# Altium PCB ILink.PcbDoc
Units mm, origin at the board's own origin, x right, y up, seen from the top; angles counter-clockwise.
Board outline 104 x 95.1 mm, 2 copper layers (Top Layer, Bottom Layer); 100 components, 66 nets, 309 pads, 31 vias.
Unrouted connection lines stored in the file: 2.
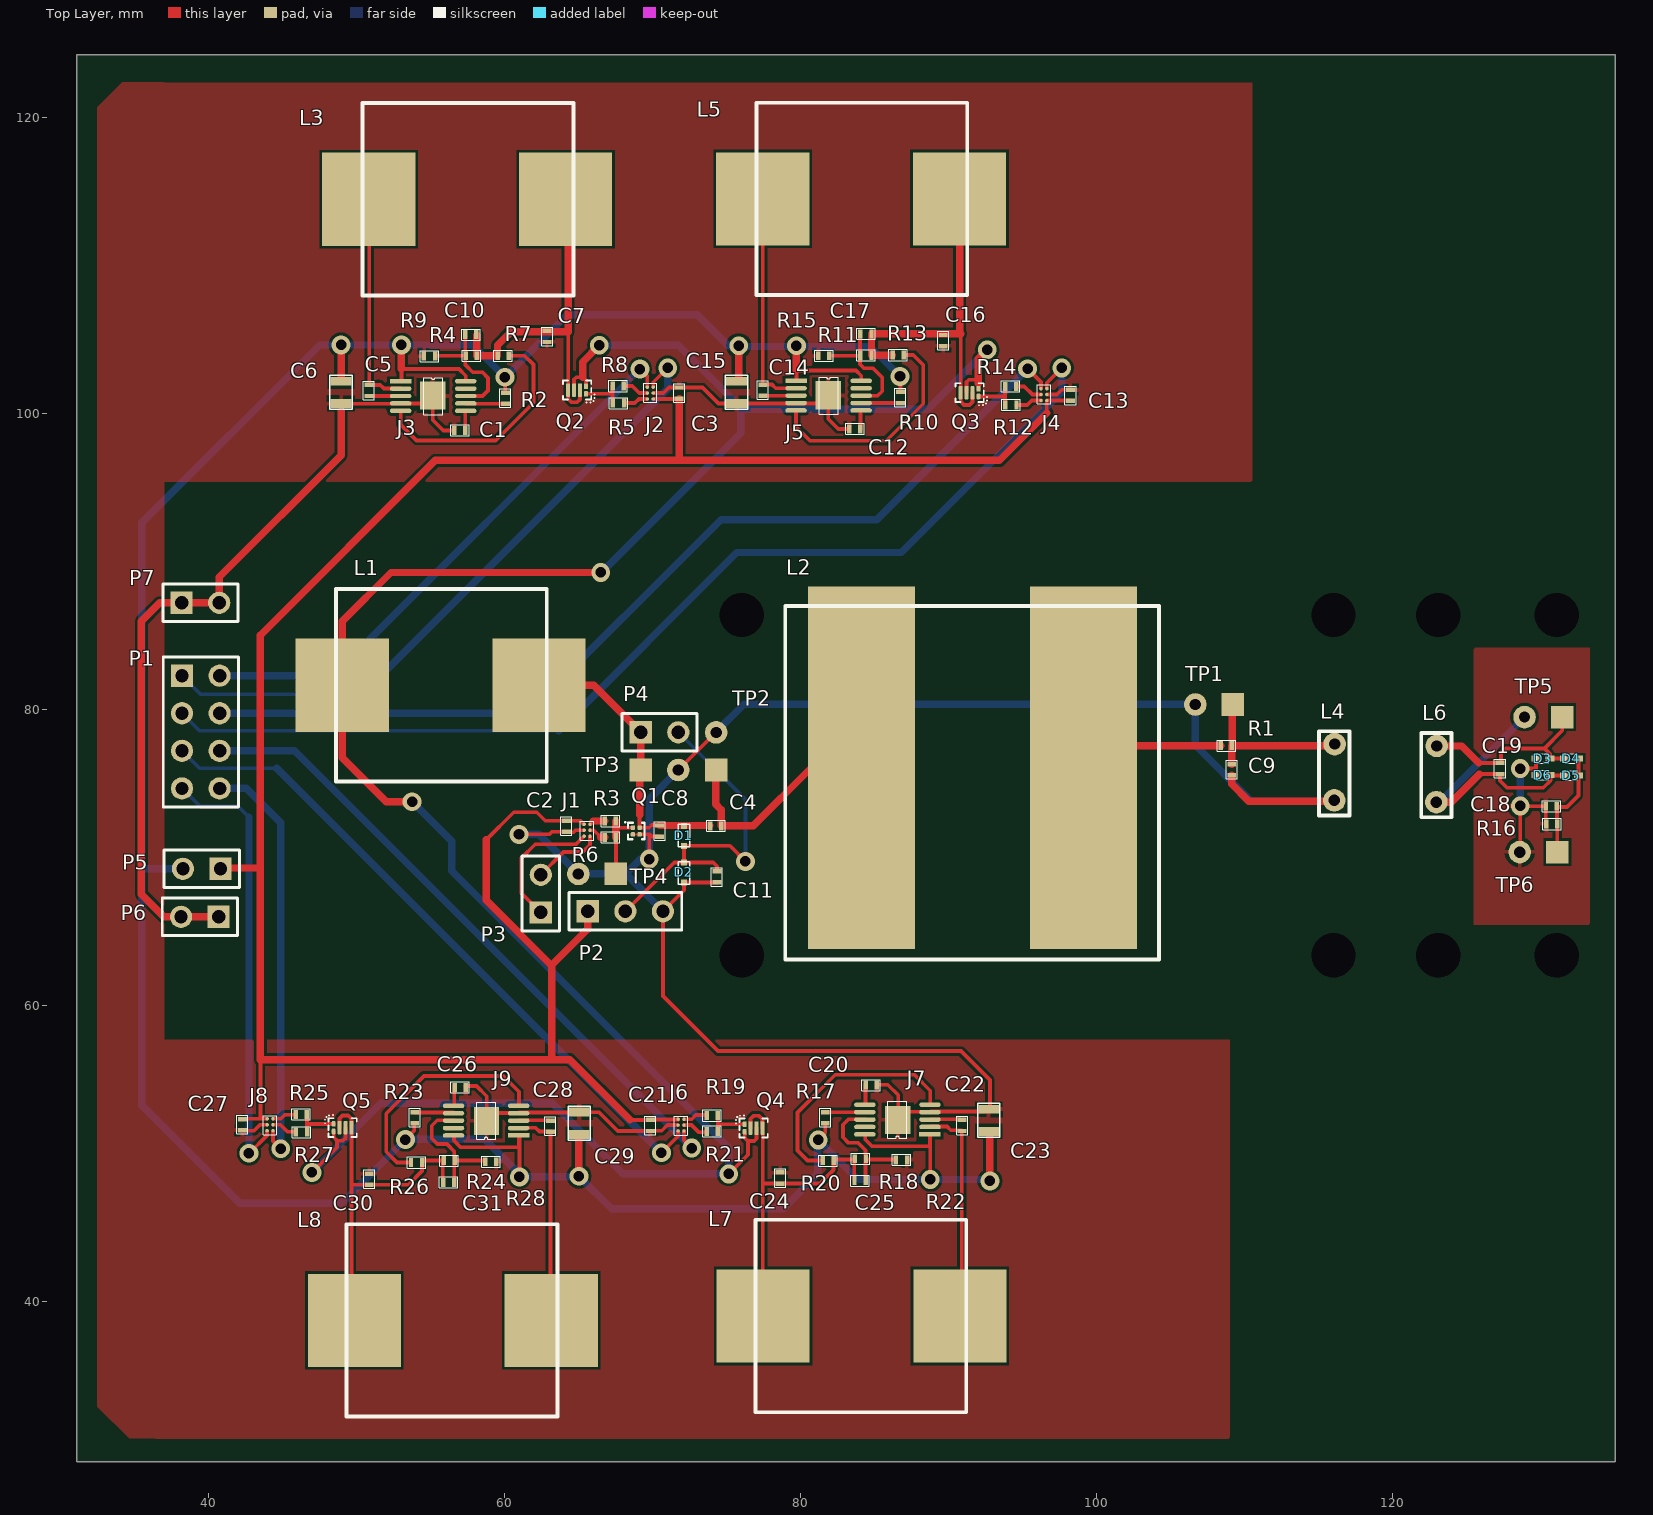
[diagram p0: Top Layer view]
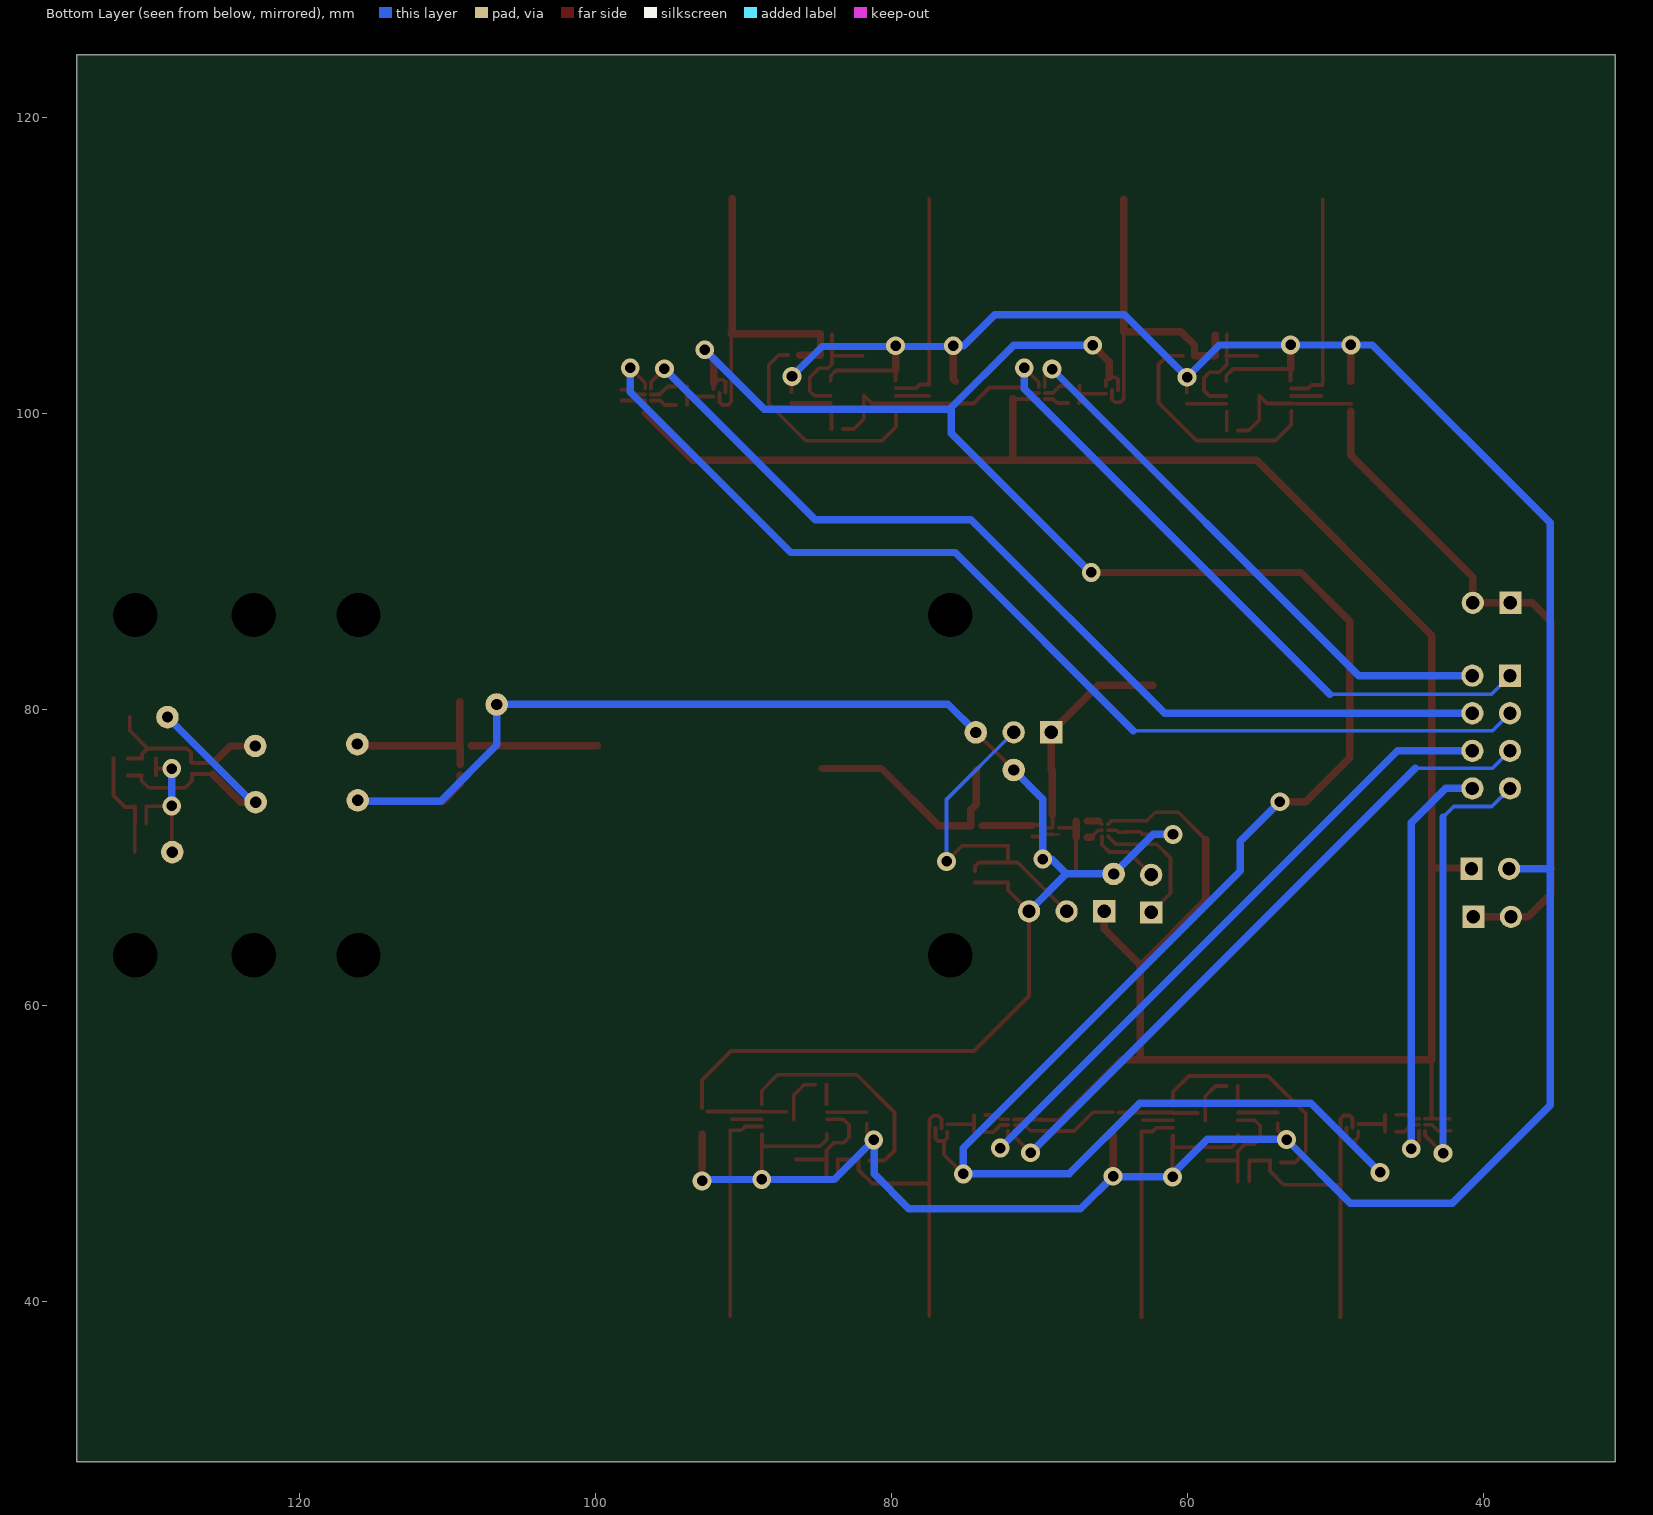
[diagram p1: Bottom Layer view, seen from below]

## Layer stack, top to bottom
Top Solder: solder mask 0.0102, Solder Resist, Dk 3.5
Top Layer: signal copper 0.0356
Dielectric 1: dielectric 0.32, FR-4, Dk 4.8
Bottom Layer: signal copper 0.0356
Bottom Solder: solder mask 0.0102, Solder Resist, Dk 3.5

## Board outline
31.075,29.15 135.075,29.15 135.075,124.25 31.075,124.25

## Design rules (kind name [scope] priority, off if disabled: settings)
Clearance [All] p1: gap=0.2 except(0.1: Arc-Arc SMDPad-Text Arc-Track Arc-SMDPad Arc-Via THPad-Via Via-Via Track-SMDPad Track-Track SMDPad-Via Track-Via Track-THPad Arc-THPad Via-Text SMDPad-SMDPad Track-Text Text-Text Arc-Text THPad-THPad THPad-Text SMDPad-THPad)
PolygonConnect [All] p1: connectstyle=Relief reliefconductorwidth=0.254 reliefentries=4 polygonreliefangle="90 Angle" airgapwidth=0.254
RoutingVias [All] p1: holewidth=0.711 width=1.27 viastyle="Through Hole" minholewidth=0.711 minwidth=1.27 maxholewidth=0.711 maxwidth=1.27
SolderMaskExpansion [All] p1: expansion=0.102
UnpouredPolygon [All] p1: allowunpoured=FALSE
Width [All] p1: maxlimit=1 minlimit=0.127 preferedwidth=0.254
29 further rules are at their usual default settings.

## Components (designator, comment, footprint, x,y, rotation, side; value= is the part's Value field where it differs from the comment)
C1 "Cap" 0402 56.975,98.85 r0 top
C2 "Cap" 0402 64.175,72.1 r270 top
C3 "Cap" 0402 71.8,101.375 r90 top
C4 "Cap" 0402 74.275,72.125 r180 top
C5 "Cap" 0402 50.825,101.55 r270 top
C6 "Cap" 0805 48.95,101.425 r90 top
C7 "Cap" 0402 62.875,105.2 r90 top
C8 "Cap" 0402 70.475,71.775 r90 top
C9 "Cap" 0402 109.15,75.925 r90 top
C10 "Cap" 0402 57.725,105.325 r180 top
C11 "Cap" 0402 74.35,68.675 r90 top
C12 "Cap" 0402 83.675,98.95 r0 top
C13 "Cap" 0402 98.25,101.225 r90 top
C14 "Cap" 0402 77.45,101.575 r270 top
C15 "Cap" 0805 75.675,101.425 r90 top
C16 "Cap" 0402 89.65,104.925 r90 top
C17 "Cap" 0402 84.425,105.375 r180 top
C18 "Cap" 0402 130.75,73.45 r0 top
C19 "Cap" 0402 127.275,76 r90 top
C20 "Cap" 0402 84.775,54.6 r180 top
C21 "Cap" 0402 69.85,51.875 r270 top
C22 "Cap" 0402 90.925,51.875 r90 top
C23 "Cap" 0805 92.725,52.225 r270 top
C24 "Cap" 0402 78.625,48.325 r270 top
C25 "Cap" 0402 84.025,48.15 r0 top
C26 "Cap" 0402 57,54.45 r180 top
C27 "Cap" 0402 42.275,51.925 r270 top
C28 "Cap" 0402 63.1,51.825 r90 top
C29 "Cap" 0805 65.05,52.025 r270 top
C30 "Cap" 0402 50.85,48.25 r270 top
C31 "Cap" 0402 56.225,48.025 r0 top
D1 "Diode BBY40" Varactor 72.125,72.125 r270 top
D2 "Diode BBY40" Varactor 72.125,68.3 r90 top
D3 "D Schottky" Diode2 129.775,76.675 r0 top
D4 "D Schottky" Diode2 131.7,76.675 r0 top
D5 "D Schottky" Diode2 131.7,75.525 r0 top
D6 "D Schottky" Diode2 129.775,75.55 r0 top
J1 "LMG1020" WCSP6 65.375,72.225 r0 top
J2 "LMG1020" WCSP6 70.05,100.975 r180 top
J3 "LTC3103" MSOP10(DGS) 52.975,102.175 r0 top
J4 "LMG1020" WCSP6 96.65,100.875 r180 top
J5 "LTC3103" MSOP10(DGS) 79.7,102.2 r0 top
J6 "LMG1020" WCSP6 71.725,52.3 r0 top
J7 "LTC3103" MSOP10(DGS) 88.75,51.275 r180 top
J8 "LMG1020" WCSP6 43.95,52.325 r0 top
J9 "LTC3103" MSOP10(DGS) 60.95,51.2 r180 top
L1 "Inductor" Inductor_1 49.025,81.625 r0 top
L2 "Inductor" Inductor_3 84.125,76.05 r0 top
L3 "Inductor" Inductor_1 50.825,114.475 r0 top
L4 "Inductor" Coils1 116.075,77.65 r270 top
L5 "Inductor" Inductor_1 77.45,114.5 r0 top
L6 "Inductor" Coils1 122.975,77.525 r270 top
L7 "Inductor" Inductor_1 90.775,39 r180 top
L8 "Inductor" Inductor_1 63.15,38.7 r180 top
P1 "Header 4X2" HDR2X4 38.2,82.275 r270 top
P2 "Header 3" HDR1X3 65.625,66.35 r0 top
P3 "Header 2" HDR1X2 62.45,66.275 r90 top
P4 "Header 2" HDR1X2 69.2,78.45 r0 top
P5 "Header 2" HDR1X2 40.8,69.225 r180 top
P6 "Header 2" HDR1X2 40.675,65.975 r180 top
P7 "Header 2" HDR1X2 38.175,87.2 r0 top
Q1 "EPC2037" EPC2X_2by2 68.9,71.775 r0 top
Q2 "EPC2014C" EPC2x40S 64.9,101.575 r180 top
Q3 "EPC2014C" EPC2x40S 91.425,101.4 r180 top
Q4 "EPC2014C" EPC2x40S 76.825,51.7 r0 top
Q5 "EPC2014C" EPC2x40S 49.05,51.725 r0 top
R1 "Res1" 0402 108.775,77.55 r0 top
R2 "Res1" 0402 60.05,101.025 r90 top
R3 "Res1" 0402 67.15,72.45 r0 top
R4 "Res1" 0402 57.75,103.9 r180 top
R5 "Res1" 0402 67.7,100.7 r180 top
R6 "Res1" 0402 67.15,71.35 r0 top
R7 "Res1" 0402 59.9,103.9 r180 top
R8 "Res1" 0402 67.675,101.85 r180 top
R9 "Res1" 0402 54.925,103.875 r0 top
R10 "Res1" 0402 86.75,101.075 r90 top
R11 "Res1" 0402 84.425,103.925 r180 top
R12 "Res1" 0402 94.225,100.575 r180 top
R13 "Res1" 0402 86.6,103.95 r180 top
R14 "Res1" 0402 94.2,101.825 r180 top
R15 "Res1" 0402 81.575,103.9 r0 top
R16 "Res1" 0402 130.775,72.25 r0 top
R17 "Res1" 0402 81.675,52.4 r270 top
R18 "Res1" 0402 84.05,49.625 r0 top
R19 "Res1" 0402 74.025,52.55 r0 top
R20 "Res1" 0402 81.875,49.5 r0 top
R21 "Res1" 0402 74.025,51.475 r0 top
R22 "Res1" 0402 86.825,49.55 r180 top
R23 "Res1" 0402 53.925,52.4 r270 top
R24 "Res1" 0402 56.25,49.5 r0 top
R25 "Res1" 0402 46.25,52.625 r0 top
R26 "Res1" 0402 54.05,49.375 r0 top
R27 "Res1" 0402 46.275,51.425 r0 top
R28 "Res1" 0402 59.075,49.425 r180 top
TP1 "Test_Point" Test_Point 109.225,80.325 r180 top
TP2 "Test_Point" Test_Point 74.3,75.9 r90 top
TP3 "Test_Point" Test_Point 69.2,75.9 r0 top
TP4 "Test_Point" Test_Point 67.525,68.875 r180 top
TP5 "Test_Point" Test_Point 131.475,79.475 r180 top
TP6 "Test_Point" Test_Point 131.15,70.35 r180 top

## Footprints (in the part's own frame and the unit in brackets; to place one, negate y for a bottom-side part, rotate by r counter-clockwise, add the part's x,y. Pads: shape width x height; smd on the part's side, far side on the other; paste and mask are expansions set on the pad)
0402 [mm]
  rect 0.3x0.6 smd: 1(-0.375,0) 2(0.375,0)
  silkscreen extent -0.63,-0.38 0.63,0.38
0805 [mm]
  rect 0.6x1.4 smd: 1(-0.75,0) 2(0.75,0)
  silkscreen extent -1.15,-0.75 1.15,0.75
Coils1 [mil] "Parisa coil footprint"
  round 60 hole 30: 1(0,0.98) 2(149.61,0)
  silkscreen extent -34,-40 190,40
Diode2 [mm] "PMEG2010AEB"
  rect 0.6x0.4 smd mask+0.05: 1(-0.075,0) 2(0.875,0)
  silkscreen extent 0,-0.32 0.8,0.33
EPC2x40S [mm]
  rrect50% 0.27x0.38 smd paste-0.048 mask-0.275: 1(-0.6,0.254) 2(-0.6,-0.254)
  rrect50% 0.27x0.909 smd paste-0.048 mask-0.275: 3(-0.2,0) 4(0.2,0) 5(0.6,0)
  oval 0.18x0.31 on Top Solder: ""(-0.6,-0.254) ""(-0.6,0.254)
  oval 0.18x0.817 on Top Solder: ""(-0.2,0) ""(0.2,0) ""(0.6,0)
  silkscreen extent -1.18,-0.64 0.96,0.85, body extent -0.87,-0.55 0.87,0.55, height 0.85
EPC2X_2by2 [mm]
  rrect50% 0.3x0.3 smd paste-0.025 mask-0.148: 1(-0.225,0.225) 2(-0.225,-0.225) 3(0.225,0.225) 4(0.225,-0.225)
  round 0.2 on Top Solder paste+0 mask+0: 1(-0.225,0.225) 2(-0.225,-0.225) 3(0.225,0.225) 4(0.225,-0.225)
  silkscreen extent -0.74,-0.56 0.56,0.59, body extent -0.45,-0.45 0.45,0.45, height 0.85
HDR1X2 [mm] "Connector; Header; 2 Position"
  rect 1.5x1.5 hole 0.9: 1(0,0)
  round 1.5 hole 0.9: 2(2.54,0)
  silkscreen extent -1.27,-1.27 3.81,1.27
HDR1X3 [mm] "Connector; Header; 3 Position"
  rect 1.5x1.5 hole 0.9: 1(0,0)
  round 1.5 hole 0.9: 2(2.54,0) 3(5.08,0)
  silkscreen extent -1.27,-1.27 6.35,1.27
HDR2X4 [mm] "Connector; Header; 4x2 Position"
  rect 1.5x1.5 hole 0.9: 1(0,0)
  round 1.5 hole 0.9: 2(0,2.54) 3(2.54,0) 4(2.54,2.54) 5(5.08,0) 6(5.08,2.54) 7(7.62,0) 8(7.62,2.54)
  silkscreen extent -1.27,-1.27 8.89,3.81
Inductor_1 [mm] "WE"
  rect 6.3x6.3 smd mask+0.2: 1(0,0) 2(13.3,0)
  silkscreen extent -0.43,-6.5 13.82,6.5
Inductor_3 [mm] "EPCOS (TDK): B82559A2122A025?"
  rect 7.25x24.5 smd: 1(0,0) 2(15,0)
  silkscreen extent -5.15,-12.95 20.1,10.92
MSOP10(DGS) [mm]
  rect 1.45x0.3 smd mask+0.05: 1(0,0)
  oval 1.45x0.3 smd mask+0.05: 2(0,-0.5) 3(0,-1) 4(0,-1.5) 5(0,-2) 6(4.4,-2) 7(4.4,-1.5) 8(4.4,-1) 9(4.4,-0.5) 10(4.4,0)
  rect 1.7x1.9 smd: 11(2.175,-0.975)
  silkscreen extent 1.56,-2.25 2.84,0.25
Test_Point [mil]
  rect 60x60 smd paste+0 mask+0: 1(0,0)
  round 60 hole 30: 2(100,0)
Varactor [mm] "Infinion Varactor BBY66Series"
  rect 0.4x0.4 smd: 1(0,0) 2(1.35,0)
  silkscreen extent -0.13,-0.4 1.4,0.4
WCSP6 [mm]
  round 0.23 smd mask+0.05: A1(0,0) A2(0.4,0) B1(0,-0.4) B2(0.4,-0.4) C1(0,-0.8) C2(0.4,-0.8)
  silkscreen extent -0.25,-1.07 0.65,0.21

## Part data
C1 C2 C3 C4 C5 C6 C7 C8 C9 C10 C11 C12 C13 C14 C15 C16 C17 C18 C19 C20 C21 C22 C23 C24 C25 C26 C27 C28 C29 C30 C31: "Capacitor"
D1 D2: "SOT23 Silicon Planar Variable Capacitance Diode"
D3 D4 D5 D6: "Schottky Diode"
J1 J2 J4 J6 J8: "Low Side GaN Driver"
J3 J5 J7 J9: "LTC3103: Step-Down DC/DC  Converter"
P1: "Header, 4-Pin, Dual row"
P2: "Header, 3-Pin"
P3 P4 P5 P6 P7: "Header, 2-Pin"
Q1: "100V 550mE"
Q2 Q3 Q4 Q5: "40V 10A 16mE"
R1 R2 R3 R4 R5 R6 R7 R8 R9 R10 R11 R12 R13 R14 R15 R16 R17 R18 R19 R20 R21 R22 R23 R24 R25 R26 R27 R28: "Resistor"

## Free pads (board coordinates)
  round 0 hole 3: H1(76.025,86.375) H2(116.025,86.375) H3(76.025,63.375) H4(116.025,63.375) H5(123.1,86.375) H6(131.1,86.375) H7(123.1,63.375) H8(131.1,63.375)

## Via types
v1: diameter 1.27, hole 0.711, Top Layer to Bottom Layer, 31 vias

## Nets (pads, with @x,y where several pads share a name; then routed paths per layer and width w, separated by ;. In a path a pad name is that pad's centre, name@x,y a point inside that pad or via, vN(x,y) a via of type N, cw(c..) or ccw(c..) an arc to the next point about the centre after c; other vN are vias at no path point)
5V0: C2.1 C3.1 C13.1 C21.1 C27.1 J1.A1 J2.A1 J4.A1 J6.A1 J8.A1 P2.1 P5.1 | length 164.1
  Top Layer w0.127: C13.1@98.225,100.875 C13.1
  Top Layer w0.254: P5.1@40.75,68.9 P5.1@40.75,69.275 ; C27.1 42.275,52.325 J8.A1 ; 43.5,52.4 43.5,56.325 ; 58.75,71.175 60.625,73.05 62.175,73.05 62.75,72.475 C2.1 65.125,72.475 J1.A1 ; 63.175,62.675 63.175,62.7 ; 68.475,52.25 C21.1 ; C21.1@69.875,52.275 J6.A1@71.725,52.275 ; J2.A1 C3.1@71.775,100.975 ; 96.65,100.025 J4.A1 C13.1@98.225,100.875
  Top Layer w0.5: P5.1@40.75,69.275 43.5,69.275 ; 58.75,71.175 58.75,67.1 63.175,62.675 63.175,56.4 ; 63.175,62.7 65.625,65.15 P2.1 ; 68.475,52.25 64.4,56.325 43.5,56.325 43.5,69.275 ; C3.1 71.8,96.825 ; 96.65,100.025 93.45,96.825 71.8,96.825 ; 43.5,69.275 43.5,85 55.325,96.825 71.8,96.825
EN1: J3.7 R2.1 | length 2.6
  Top Layer w0.254: J3.7@57.4,100.65 R2.1
EN2: J5.7 R10.1 | length 2.6
  Top Layer w0.254: J5.7 R10.1
EN3: J7.7 R17.1 | length 2.6
  Top Layer w0.254: R17.1@81.725,52.775 J7.7@84.375,52.775
EN4: J9.7 R23.1 | length 2.6
  Top Layer w0.254: R23.1@53.9,52.75 J9.7@56.55,52.75
GND: C1.1 C2.2 C3.2 C6.1 C7.1 C8.1 C9.1 C11.1 C12.1 C13.2 C15.1 C16.1 C20.1 C21.2 C23.1 C24.1 C26.1 C27.2 C29.1 C30.1 D2.1 J1.B1 J2.B1 J3.4 J3.11 J4.B1 J5.4 J5.11 J6.B1 J7.4 J7.11 J8.B1 J9.4 J9.11 L4.2 P2.3 P6.1 P6.2 P7.1 P7.2 Q1.2@68.675,71.55 Q1.4@69.125,71.55 R9.1 R15.1 R22.1 R28.1 TP1.2 TP2.2 TP3.2 TP4.2 | length 224.6
  Top Layer w0.127: Q1.2@68.675,71.55 Q1.4@69.125,71.55
  Top Layer w0.25: C27.2@42.225,51.525 43.075,51.525
  Top Layer w0.254: 43.075,51.525 43.475,51.925 J8.B1 ; C6.1@48.95,100.65 J3.4@52.95,100.65 ; J3.4 54.625,100.675 J3.11 55.15,99.55 55.85,98.85 C1.1 ; C26.1@57.35,54.55 58.1,54.55 58.8,53.85 J9.11@58.8,52.2 ; J9.11@59.325,52.725 J9.4@60.975,52.725 ; v1(60.975,71.55) 60.975,71.75 61.175,71.55 63.025,71.55 63.2,71.725 C2.2 64.2,71.7 64.675,71.7 64.8,71.825 J1.B1 ; J9.4@61,52.75 C29.1@64.65,52.75 ; C29.1 66.375,52.775 67.65,51.5 C21.2 ; Q1.4@69.125,71.55 69.8,71.55 69.95,71.4 C8.1 ; v1(69.775,69.875) 69.775,71.525 ; C21.2@69.925,51.525 70.625,51.525 71,51.9 J6.B1@71.675,51.9 ; J2.B1 70.725,101.375 71.1,101.75 C3.2 73.375,101.75 74.45,100.675 C15.1 81.325,100.675 J5.11 81.875,99.625 82.55,98.95 C12.1 ; TP3.2 TP2.2@74.275,78.435 ; C11.1 D2.1 72.125,67.77 P2.3 70.705,60.62 74.425,56.9 90.85,56.9 92.8,54.95 C23.1@92.8,53.05 ; C20.1@85.15,54.625 85.9,54.625 86.6,53.925 J7.11@86.6,52.275 ; J7.11@87.125,52.8 J7.4@88.775,52.8 ; J7.4@88.8,52.825 C23.1@92.45,52.825 ; J4.B1 97.325,101.275 97.65,101.6 C13.2
  Top Layer w0.5: P6.1 P6.2 36.975,65.975 35.45,67.5 35.45,85.95 36.7,87.2 P7.1 P7.2 40.715,88.94 48.95,97.175 48.95,100.148 ; C9.1 109.15,74.95 110.3,73.8 L4.2@115.975,73.8
  Bottom Layer w0.5: v1(60.975,71.55) 62.31,71.55 TP4.2 68.18,68.875 ; P2.3 68.18,68.875 ; TP3.2 69.775,73.935 v1(69.775,69.875) 69.18,69.875 68.18,68.875 ; TP2.2@74.275,78.44 76.185,80.35 TP1.2@106.685,80.35 ; TP1.2 106.685,77.59 110.475,73.8 L4.2@115.975,73.8
GND2: C18.1 D3.1 D6.1 R16.1 TP6.2 | length 10.6
  Top Layer w0.254: TP6.2@128.65,70.39 v1@128.65,73.45 ; v1(128.65,73.475) v1@128.65,73.45 ; v1(128.65,76) 129.65,76 ; D6.1 D3.1 ; R16.1@130.375,72.275 C18.1 v1@128.65,73.45
  Bottom Layer w0.5: v1(128.65,73.475) v1(128.65,76)
NetC1_2: C1.2 J3.6 | length 1.3
  Top Layer w0.254: C1.2 J3.6@57.35,100.15
NetC5_1: C5.1 J3.2 L3.1 | length 14.8
  Top Layer w0.254: L3.1@50.852,114.475 50.852,101.925 51.6,101.925 51.85,101.675 J3.2
NetC5_2: C5.2 J3.3 | length 2
  Top Layer w0.254: C5.2@50.95,101.175 J3.3
NetC10_2: C10.2 J3.8 R4.2 R9.2 | length 8.5
  Top Layer w0.254: R9.2@55.3,103.9 R4.2@57.35,103.9 ; C10.2 R4.2@57.35,103.9 ; J3.8 58.5,101.175 58.875,101.55 58.875,102.4 58.5,102.775 57.85,102.775 57.35,103.275 R4.2@57.35,103.9 ; R4.2 R4.2@57.4,103.9
NetC12_2: C12.2 J5.6 | length 1.2
  Top Layer w0.254: C12.2 J5.6@84.05,100.15
NetC14_1: C14.1 J5.2 L5.1 | length 14.9
  Top Layer w0.254: L5.1 C14.1 78.075,101.95 78.325,101.7 J5.2
NetC14_2: C14.2 J5.3 | length 2.3
  Top Layer w0.254: C14.2 J5.3
NetC17_2: C17.2 J5.8 R11.2 R15.2 | length 8.4
  Top Layer w0.254: R15.2 R11.2@84.025,103.9 ; C17.2@84.025,105.35 R11.2@84.025,103.9 ; J5.8 85.225,101.2 85.525,101.5 85.525,102.425 84.9,103.05 84.3,103.05 84.025,103.325 R11.2@84.025,103.9
NetC20_2: C20.2 J7.6 | length 1.3
  Top Layer w0.254: J7.6@84.4,53.325 C20.2@84.4,54.625
NetC22_1: C22.1 J7.2 L7.1 | length 14.8
  Top Layer w0.254: J7.2@88.775,51.8 89.9,51.8 90.15,51.55 90.898,51.55 L7.1@90.898,39
NetC22_2: C22.2 J7.3 | length 2
  Top Layer w0.254: J7.3@88.775,52.3 C22.2@90.8,52.3
NetC25_2: C25.2 J7.8 R18.2 R22.2 | length 8.6
  Top Layer w0.127: R18.2@84.4,49.6 R18.2
  Top Layer w0.254: J7.8@84.375,52.3 83.25,52.3 82.875,51.925 82.875,51.075 83.25,50.7 83.9,50.7 84.4,50.2 R18.2@84.4,49.6 ; C25.2 R18.2@84.4,49.6 ; R22.2@86.45,49.575 84.4,49.575 R18.2@84.4,49.6
NetC26_2: C26.2 J9.6 | length 1.3
  Top Layer w0.254: J9.6@56.6,53.25 C26.2@56.6,54.55
NetC28_1: C28.1 J9.2 L8.1 | length 14.8
  Top Layer w0.254: J9.2@60.975,51.725 62.1,51.725 62.35,51.475 63.098,51.475 L8.1@63.098,38.925
NetC28_2: C28.2 J9.3 | length 2
  Top Layer w0.254: J9.3@60.975,52.225 C28.2@63,52.225
NetC31_2: C31.2 J9.8 R24.2 R28.2 | length 8.5
  Top Layer w0.254: J9.8@56.575,52.225 55.45,52.225 55.075,51.85 55.075,51 55.45,50.625 56.1,50.625 56.6,50.125 R24.2@56.6,49.5 ; C31.2@56.6,48.075 R24.2@56.6,49.5 ; R28.2@58.65,49.5 R24.2@56.6,49.5
NetJ1_A2: J1.A2 R3.1 | length 1.1
  Top Layer w0.254: J1.A2 66,72.45
  Top Layer w0.5: 66,72.45 R3.1
NetJ1_B2: J1.B2 R6.1 | length 1.2
  Top Layer w0.254: J1.B2 66.025,71.825 66.5,71.35
  Top Layer w0.5: 66.5,71.35 R6.1
NetJ2_A2: J2.A2 R5.1 | length 1.7
  Top Layer w0.254: R5.1 68.8,100.7 69.075,100.975 J2.A2
NetJ2_B2: J2.B2 R8.1 | length 1.8
  Top Layer w0.254: R8.1 68.625,101.85 69.1,101.375 J2.B2
NetJ3_5: J3.5 R7.1 | length 15.9
  Top Layer w0.254: J3.5 52.975,99.25 54.05,98.175 59.4,98.175 61.95,100.725 61.95,103.3 61.35,103.9 R7.1
NetJ4_A2: J4.A2 R12.1 | length 1.8
  Top Layer w0.254: R12.1 95.325,100.575 95.625,100.875 J4.A2
NetJ4_B2: J4.B2 R14.1 | length 1.9
  Top Layer w0.254: R14.1 95.125,101.825 95.675,101.275 J4.B2
NetJ5_5: J5.5 R13.1 | length 15.4
  Top Layer w0.254: J5.5 79.7,99.1 80.65,98.15 85.8,98.15 88.3,100.65 88.3,103.275 87.625,103.95 R13.1
NetJ6_A2: J6.A2 R19.1 | length 1.6
  Top Layer w0.254: J6.A2 72.65,52.3 72.925,52.575 R19.1@73.65,52.575
NetJ6_B2: J6.B2 R21.1 | length 1.7
  Top Layer w0.254: J6.B2 72.625,51.9 73.1,51.425 R21.1@73.675,51.425
NetJ7_5: J7.5 R20.1 | length 16
  Top Layer w0.254: R20.1 80.475,49.5 79.8,50.175 79.8,52.75 82.35,55.3 87.7,55.3 88.775,54.225 J7.5@88.775,53.3
NetJ8_A2: J8.A2 R25.1 | length 1.6
  Top Layer w0.254: J8.A2 44.875,52.325 45.15,52.6 R25.1@45.875,52.6
NetJ8_B2: J8.B2 R27.1 | length 1.7
  Top Layer w0.254: J8.B2 44.85,51.925 45.325,51.45 R27.1@45.9,51.45
NetJ9_5: J9.5 R26.1 | length 16
  Top Layer w0.254: R26.1 52.725,49.375 52,50.1 52,52.675 54.55,55.225 59.9,55.225 60.975,54.15 J9.5@60.975,53.225
NetL2_2: L2.2 R1.1 | length 8.5
  Top Layer w0.5: L2.2@99.875,77.55 R1.1
NetQ2_1: Q2.1 R5.2 R8.2 | length 3
  Top Layer w0.254: Q2.1 67.296,101.321 ; R8.2 67.3,100.725 R5.2
NetQ3_1: Q3.1 R12.2 R14.2 | length 3
  Top Layer w0.254: Q3.1 93.796,101.146 ; R12.2@93.825,100.6 R14.2
NetQ4_1: Q4.1 R19.2 R21.2 | length 2.9
  Top Layer w0.254: R21.2@74.425,51.425 R19.2@74.425,52.55 ; 74.429,51.954 Q4.1
NetQ5_1: Q5.1 R25.2 R27.2 | length 2.9
  Top Layer w0.254: R27.2@46.65,51.45 R25.2@46.65,52.575 ; 46.654,51.979 Q5.1
PS1C+: J2.C1 P1.1 | length 45
  Top Layer w0.254: J2.C1 70.05,102.1 v1(71.025,103.075)
  Bottom Layer w0.254: P1.1 39.45,81.025 50.375,81.025
  Bottom Layer w0.5: 50.375,81.025 71.025,101.675 v1(71.025,103.075)
PS1C-: J2.C2 P1.2 | length 38.8
  Top Layer w0.127: v1(69.15,103) 69.15,102.65 v1@69.325,102.825
  Top Layer w0.254: v1@69.325,102.825 69.65,102.5 J2.C2
  Bottom Layer w0.5: P1.2 48.425,82.275 v1(69.15,103)
PS2C+: J4.C1 P1.3 | length 72.9
  Top Layer w0.254: J4.C1 96.65,102.075 v1(97.65,103.075)
  Bottom Layer w0.254: P1.3 39.385,78.55 63.65,78.55
  Bottom Layer w0.5: 63.65,78.55 75.7,90.6 86.8,90.6 97.65,101.45 v1(97.65,103.075)
PS2C-: J4.C2 P1.4 | length 66
  Top Layer w0.254: v1(95.35,103.025) 96.25,102.125 J4.C2
  Bottom Layer w0.5: P1.4 61.535,79.735 74.625,92.825 85.15,92.825 v1(95.35,103.025)
PS3C+: J6.C1 P1.5 | length 45.6
  Top Layer w0.254: v1(70.6,50.025) 71.725,51.15 J6.C1
  Bottom Layer w0.254: P1.5 39.37,76.025 44.6,76.025
  Bottom Layer w0.5: 44.6,76.025 v1(70.6,50.025)
PS3C-: J6.C2 P1.6 | length 44.4
  Top Layer w0.25: 72.125,50.875 J6.C2
  Top Layer w0.254: 72.125,50.875 v1(72.65,50.35)
  Bottom Layer w0.5: P1.6 45.805,77.195 v1(72.65,50.35)
PS4C+: J8.C1 P1.7 | length 30.1
  Top Layer w0.127: v1(42.725,50) v1@42.75,50
  Top Layer w0.254: v1@42.75,50 43.95,51.2 J8.C1
  Bottom Layer w0.254: P1.7 39.43,73.425 42,73.425 42.725,72.7
  Bottom Layer w0.5: v1(42.725,50) 42.725,72.7
PS4C-: J8.C2 P1.8 | length 28.6
  Top Layer w0.254: J8.C2 44.35,50.825 v1(44.875,50.3)
  Bottom Layer w0.5: P1.8 42.545,74.655 44.875,72.325 v1(44.875,50.3)
SC+: J1.C1 P3.1 | length 9
  Top Layer w0.254: P3.1 61.15,67.575 61.15,69.95 62.075,70.875 64.825,70.875 J1.C1
SC-: J1.C2 P3.2 | length 4.7
  Top Layer w0.254: P3.2 63.985,70.35 65.275,70.35 65.775,70.85 J1.C2
V1: C4.1 L2.1 TP2.1 | length 15.6
  Top Layer w0.5: TP2.1@74.275,75.9 74.275,73.575 74.65,73.2 C4.1 76.8,72.125 80.675,76 L2.1@84.7,76
VBIAS: C11.2 D1.2 D2.2 P2.2 P4.2 | length 24.3
  Top Layer w0.254: P2.2 71.465,69.65 D2.2 ; C11.2 74.35,69.4 74.1,69.65 D2.2 ; v1(76.275,69.725) 75.225,70.775 D1.2 D2.2
  Bottom Layer w0.254: P4.2 76.275,73.915 v1(76.275,69.725)
VCC: L1.1 Q2.2 Q2.4 Q3.2 Q3.4 Q4.2 Q4.4 Q5.2 Q5.4 | length 163.8
  Top Layer w0.254: v1(46.975,48.7) 48.675,50.4 48.675,50.85 ; Q5.2 48.45,51.075 48.675,50.85 ; Q5.4 49.25,51 49.1,50.85 48.675,50.85 ; Q2.4 64.7,102.3 64.85,102.45 65.275,102.45 65.5,102.225 Q2.2 ; v1(75.15,48.6) 76.45,49.9 76.45,50.825 ; Q4.2 76.225,51.05 76.45,50.825 ; Q4.4 77.025,50.975 76.875,50.825 76.45,50.825 ; Q3.4 91.225,102.125 91.375,102.275 91.8,102.275 92.025,102.05 Q3.2
  Top Layer w0.5: v1(53.75,73.75) 52,73.75 49.025,76.725 L1.1 49.025,85.95 52.325,89.25 v1(66.5,89.25) ; 65.275,102.45 65.275,103.475 v1(66.4,104.6) ; 92.025,102.05 92.025,103.7 v1(92.625,104.3)
  Bottom Layer w0.5: v1(46.975,48.7) 51.65,53.375 63.225,53.375 68,48.6 v1(75.15,48.6) 75.15,50.35 56.425,69.075 56.425,71.075 v1(53.75,73.75) ; v1(66.4,104.6) 71.75,104.6 76.013,100.337 ; v1@66.575,89.275 75.95,98.65 75.95,100.275 88.6,100.275 v1(92.625,104.3)
VCC1: C7.2 C10.1 L3.2 Q2.3 Q2.5 R4.1 R7.2 | length 23.8
  Top Layer w0.254: 64.3,105.525 Q2.5 64.3,100.975 64.525,100.75 64.9,100.75 65.1,100.95 Q2.3
  Top Layer w0.5: C10.1@58.125,105.3 R4.1 R7.2 59.525,104.6 60.45,105.525 64.3,105.525 L3.2@64.3,114.475
VCC2: C16.2 C17.1 L5.2 Q3.3 Q3.5 R11.1 R13.2 | length 24.1
  Top Layer w0.254: 90.825,105.375 Q3.5 90.825,100.8 91.05,100.575 91.425,100.575 91.625,100.775 Q3.3
  Top Layer w0.5: R13.2@86.2,103.925 R11.1 C17.1 90.825,105.375 ; 90.75,105.45 L5.2
VCC3: C24.2 C25.1 L7.2 Q4.3 Q4.5 R18.1 R20.2 | length 23.8
  Top Layer w0.254: Q4.3 76.625,52.325 76.825,52.525 77.2,52.525 77.425,52.3 Q4.5 ; L7.2@77.45,39 77.45,47.95 ; Q4.5@77.45,51.9 77.45,47.95 ; C25.1@83.625,48.175 83.625,49.575 82.225,49.575 82.225,48.875 81.3,47.95 77.45,47.95
VCC4: C30.2 C31.1 L8.2 Q5.3 Q5.5 R24.1 R26.2 | length 23.7
  Top Layer w0.254: Q5.3 48.85,52.35 49.05,52.55 49.425,52.55 49.65,52.325 Q5.5 49.65,47.875 ; L8.2@49.65,38.925 49.65,47.875 ; C31.1@55.825,48.1 55.825,49.5 54.425,49.5 54.425,48.8 53.5,47.875 49.65,47.875
VDS: C4.2 C8.2 D1.1 L1.2 P4.1 Q1.3@69.125,72 TP3.1 | length 19.4
  Top Layer w0.254: 69.125,72.8 69.125,72 69.775,72 69.95,72.175 C8.2@70.45,72.175
  Top Layer w0.5: L1.2 66.025,81.625 P4.1 TP3.1 ; 69.125,72.875 TP3.1@69.125,75.9 ; C8.2 C4.2@73.875,72.15
VGS: Q1.1@68.675,72 R3.2 R6.2 TP4.1 | length 4.7
  Top Layer w0.254: TP4.1 R6.2 ; 67.525,72 Q1.1@68.675,72
  Top Layer w0.5: R6.2 R3.2
VIN: C6.2 C15.2 C23.2 C29.2 J3.1 J3.10 J5.1 J5.10 J7.1 J7.10 J9.1 J9.10 P5.2 R2.2 R10.2 R17.2 R23.2 | length 218.1
  Top Layer w0.127: J3.1 J3.1@53.025,102.225
  Top Layer w0.254: J3.1@53.025,102.225 53.025,103 56.925,103 57.375,102.55 J3.10 ; v1(53.3,50.925) 53.9,51.525 R23.2@53.9,52 ; J9.10@56.575,51.225 56.575,50.85 57.025,50.4 60.95,50.4 J9.1 ; v1(60.025,102.45) 60.05,102.425 R2.2 ; v1(61,48.4) J9.1@61,51.15 ; J5.1@79.725,102.225 79.725,102.9 83.75,102.9 84.1,102.55 J5.10 ; v1(81.2,50.9) 81.675,51.375 R17.2 ; J7.10@84.375,51.3 84.375,50.925 84.825,50.475 88.75,50.475 J7.1 ; v1(86.725,102.5) 86.75,102.475 R10.2 ; v1(88.775,48.225) J7.1@88.775,51.25
  Top Layer w0.5: C6.2 v1(48.95,104.625) ; 53.025,103 v1(53.025,104.625) ; v1@65,48.45 C29.2@65,51.225 ; C15.2 75.825,102.325 v1(75.825,104.575) ; 79.725,102.9 v1(79.725,104.575) ; v1(92.8,48.125) 92.8,51.25 92.775,51.275 C23.2@92.8,51.3
  Bottom Layer w0.5: 35.45,69.225 P5.2 ; 35.475,67.925 35.475,92.6 47.5,104.625 v1(48.95,104.625) v1(53.025,104.625) 57.85,104.625 v1(60.025,102.45) 64.25,106.675 73.025,106.675 75.125,104.575 v1(75.825,104.575) 75.875,104.525 84.7,104.525 v1(86.725,102.5) ; 35.475,68.175 35.475,53.25 42.1,46.625 49,46.625 v1(53.3,50.925) ; v1@53.925,50.95 58.65,50.95 60.95,48.65 v1@60.95,48.425 ; v1@61.075,48.4 v1@65,48.4 ; v1(65.025,48.45) 67.225,46.25 78.825,46.25 81.175,48.6 81.175,50.925 83.875,48.225 v1(88.775,48.225) v1@92.775,48.225
VOUT: C18.2 D4.2 D5.2 R16.2 TP6.1 | length 7.3
  Top Layer w0.254: R16.2@131.125,72.275 C18.2 ; TP6.1 R16.2 ; C18.2@131.15,73.45 131.2,73.4 131.8,73.4 132.575,74.175 D5.2 D4.2
VRX+: C19.2 D3.2 D4.1 L6.1 TP5.1 | length 12.9
  Top Layer w0.254: 125.85,76.375 C19.2 ; C19.2@127.35,76.425 127.35,77.075 127.625,77.35 130.275,77.35 ; TP5.1 131.475,78.55 130.275,77.35 ; D4.1 D3.2 130.65,76.975 130.275,77.35
  Top Layer w0.5: L6.1 124.7,77.525 125.85,76.375
VRX-: C19.1 D5.1 D6.2 L6.2 TP5.2 | length 19
  Top Layer w0.254: 125.875,75.625 C19.1 127.275,75.175 127.75,74.7 130.2,74.7 130.7,75.2 130.7,75.5 130.675,75.525 D5.1
  Top Layer w0.5: L6.2 123.975,73.725 125.875,75.625
  Bottom Layer w0.5: L6.2 123.185,73.725 TP5.2
VTX: C9.2 L4.1 R1.2 TP1.1 | length 11
  Top Layer w0.254: R1.2 R1.2@109.175,77.575
  Top Layer w0.5: C9.2 R1.2 L4.1@115.95,77.55 ; R1.2@109.175,77.575 TP1.1@109.175,80.525
pads on no net: J3.9 J5.9 J7.9 J9.9 Q1.1@68.675,72 Q1.2@68.675,71.55 Q1.3@69.125,72 Q1.4@69.125,71.55 Q2. Q3. Q4. Q5.

## Polygon pours and split planes (outlines as drawn)
GND2 on Top Layer "Gnd2_Pour" (solid, pour order 8): 133.35,84.15 133.35,65.45 125.5,65.45 125.5,84.15
GND on Top Layer "Gnd_Pour" (solid, pour order 6): 110.525,95.375 110.525,122.35 34.45,122.35 34.45,95.375
GND on Top Layer "Gnd_Pour" (solid, pour order 5): 109,30.7 109,57.675 36.325,57.675 36.325,30.7
GND on Top Layer "Gnd_Pour" (solid, pour order 7): 34.15,122.375 37,122.375 37,30.725 34.625,30.725 32.475,32.875 32.475,120.7

## Silkscreen, mask and mechanical layers (free items; w line width, h text height)
Mechanical 1:
  lines w0.254: 119.4,123.7 119.725,123.7 119.725,29.6 ; 119.55,29.6 120.05,29.6 ; 31.725,33.1 ccw(c35.225,33.1) 35.225,29.6 130.25,29.6 ccw(c130.25,33.875) 134.525,33.875 134.525,118.75 ccw(c129.575,118.75) 129.575,123.7 35.2,123.7 ccw(c35.2,120.225) 31.725,120.225 31.725,33.1

## Dimensions
34.625,30.55 to 34.3,122.325 on Top Overlay
31.725,33.1 to 134.525,33.875 on Top Overlay